# Altium PCB PCB2.PcbDoc
Units mm, origin at the board's own origin, x right, y up, seen from the top; angles counter-clockwise.
Board outline 160 x 90 mm, 2 copper layers (Top Layer, Bottom Layer); 56 components, 44 nets, 191 pads, 30 vias.
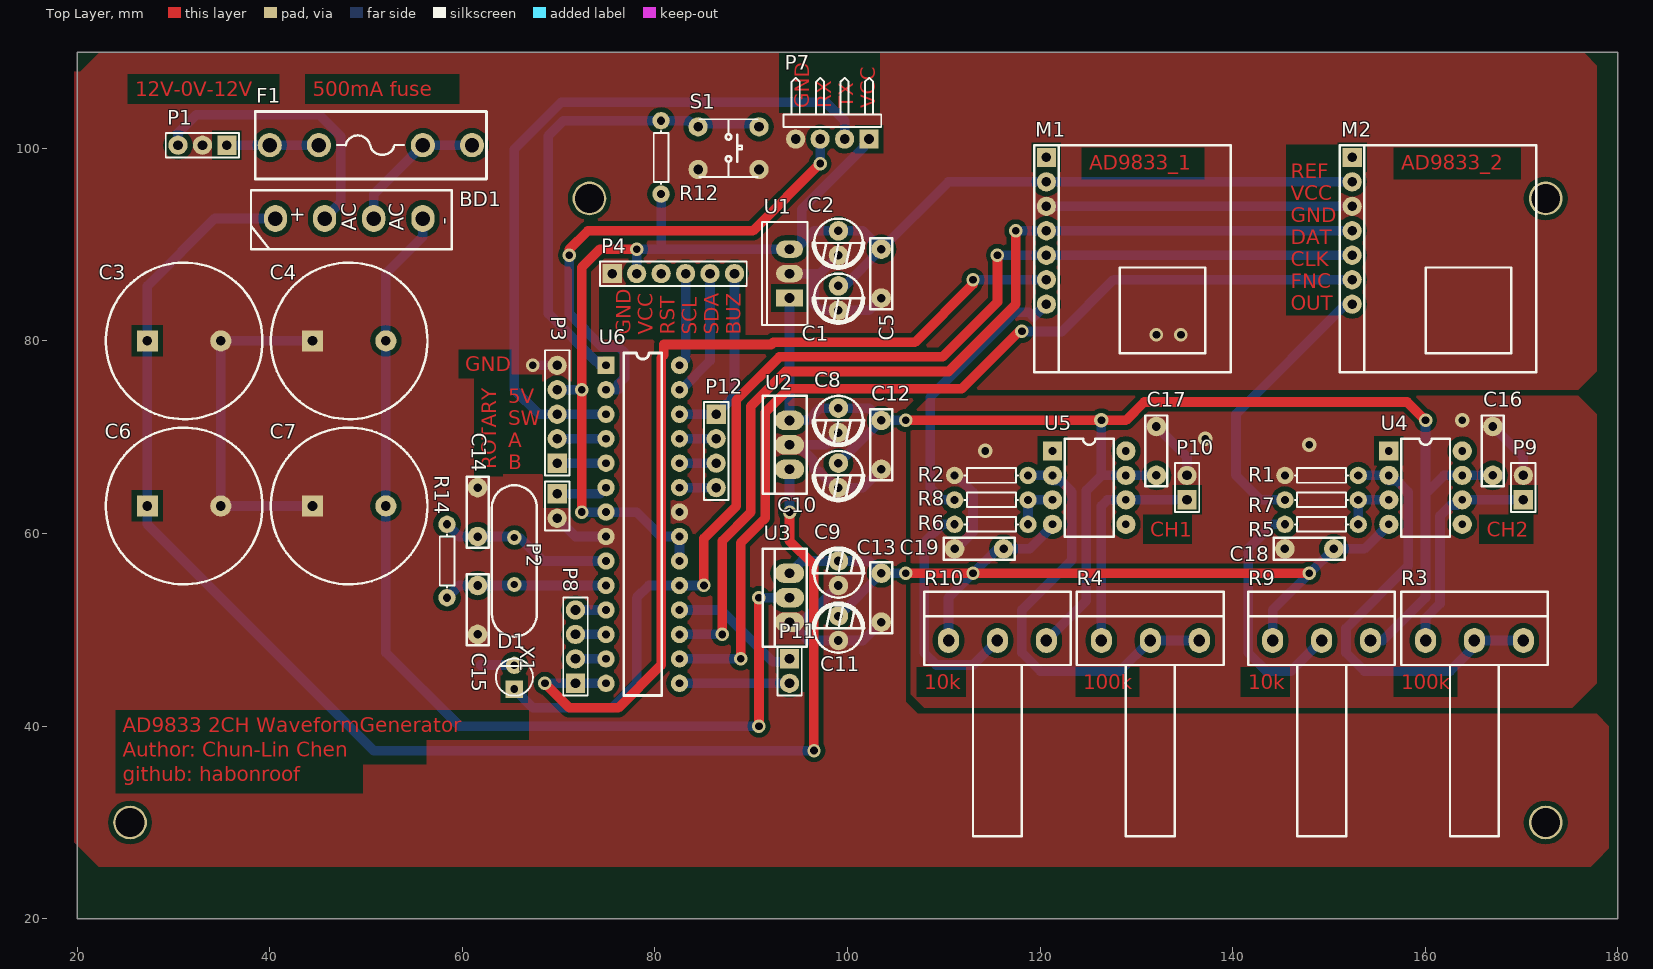
[diagram p0: Top Layer view]
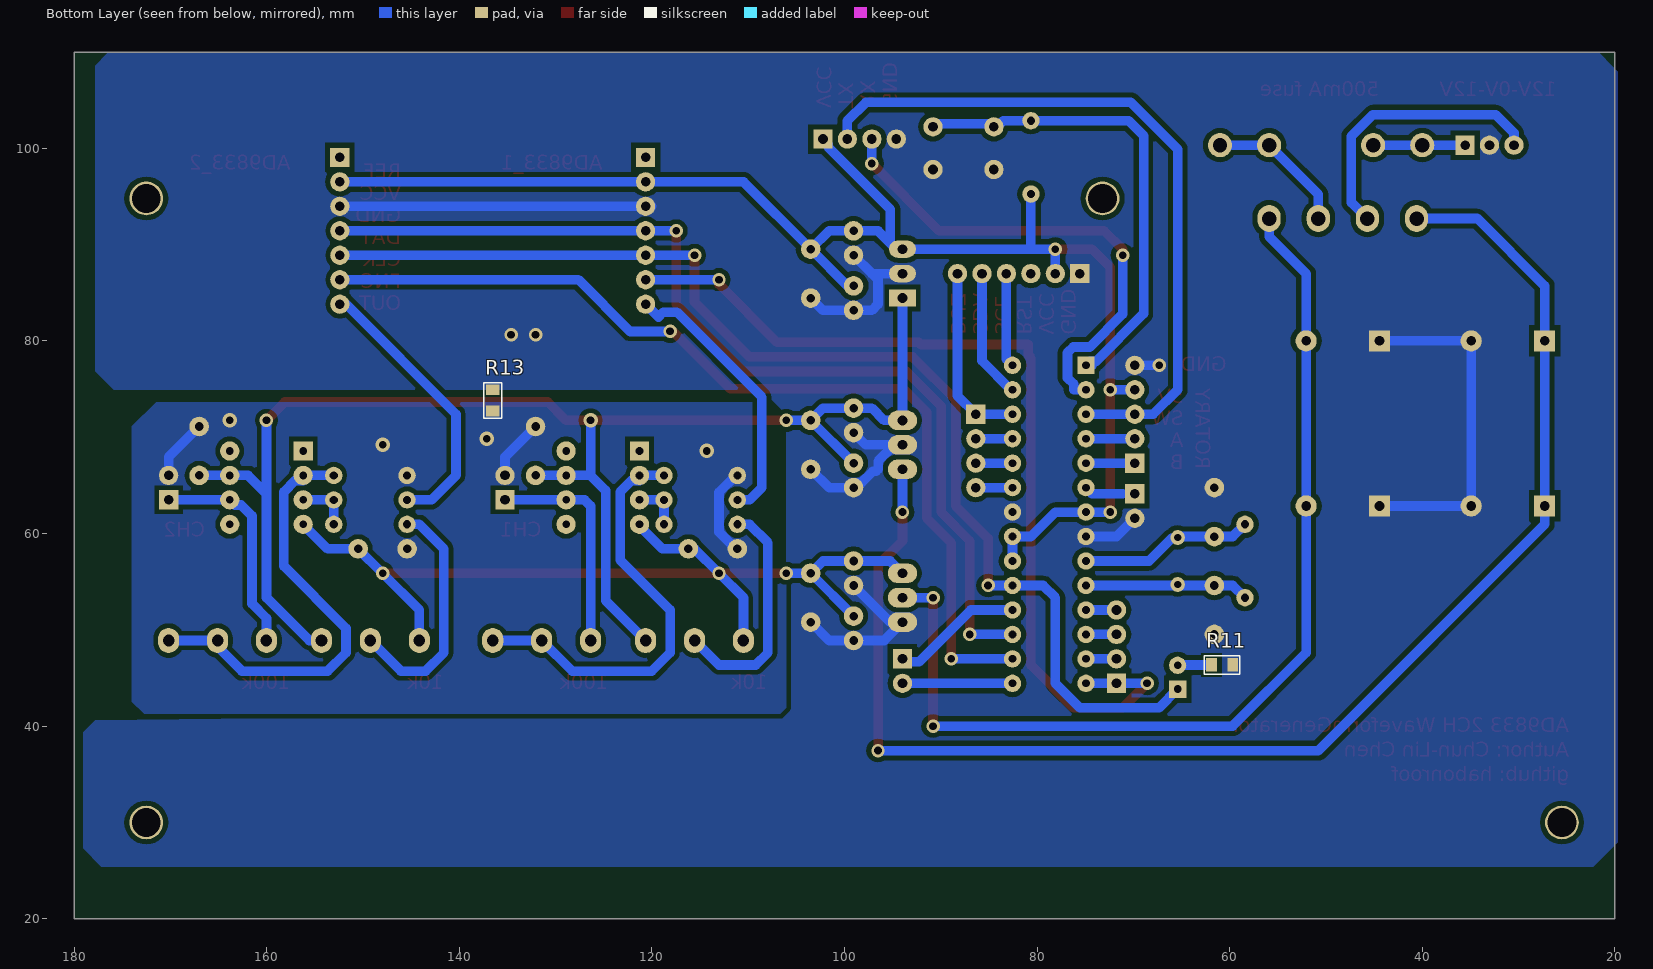
[diagram p1: Bottom Layer view, seen from below]

## Layer stack, top to bottom
Top Solder: solder mask 0.0102, Solder Resist, Dk 3.5
Top Layer: signal copper 0.0356
Dielectric 1: dielectric 0.32, FR-4, Dk 4.8
Bottom Layer: signal copper 0.0356
Bottom Solder: solder mask 0.0102, Solder Resist, Dk 3.5

## Board outline
20,20 20,110 180,110 180,20

## Design rules (kind name [scope] priority, off if disabled: settings)
Clearance [All] p1: gap=0.508
PlaneConnect [All] p1: planeconnectstyle=Direct reliefexpansion=0.508 reliefentries=4 reliefconductorwidth=0.254 reliefairgap=0.254
PolygonConnect [All] p1: connectstyle=Direct reliefconductorwidth=0.254 reliefentries=4 polygonreliefangle="90 Angle" airgapwidth=0.254
RoutingVias [All] p1: holewidth=0.711 width=1.27 viastyle="Through Hole" minholewidth=0.711 minwidth=1.27 maxholewidth=0.711 maxwidth=1.27
SolderMaskExpansion [All] p1: expansion=0.102
Width [All] p1: maxlimit=4 minlimit=0.254 preferedwidth=1
29 further rules are at their usual default settings.

## Components (designator, comment, footprint, x,y, rotation, side; value= is the part's Value field where it differs from the comment)
BD1 "Bridge" Bridge_KBL406 49.109,95.123 r90 top
C1 "JACKON LHK 100uF/10V" RAD-100_200 99.06,84.455 r270 top
C2 "JACKON LHK 100uF/10V" RAD-100_200 99.06,90.17 r270 top
C3 "1000uF/50V" Cap_M_1000uF/50V 31.115,80.01 r0 top
C4 "1000uF/50V" Cap_M_1000uF/50V 48.26,80.01 r0 top
C5 "100n/100V" CAP-200_100*300 103.505,86.995 r90 top
C6 "1000uF/50V" Cap_M_1000uF/50V 31.115,62.865 r0 top
C7 "1000uF/50V" Cap_M_1000uF/50V 48.26,62.865 r0 top
C8 "JACKON LHK 47uF/35V" RAD-100_200 99.06,71.755 r270 top
C9 "JACKON LHK 47uF/35V" RAD-100_200 99.06,55.88 r90 top
C10 "JACKON LHK 47uF/35V" RAD-100_200 99.06,66.04 r270 top
C11 "JACKON LHK 47uF/35V" RAD-100_200 99.06,50.165 r90 top
C12 "100n/100V" CAP-200_100*300 103.505,69.215 r90 top
C13 "100n/100V" CAP-200_100*300 103.505,53.34 r270 top
C14 "22p/1kV" CAP-200_100*300 61.595,62.23 r270 top
C15 "22p/1kV" CAP-200_100*300 61.595,52.07 r90 top
C16 "100n/100V" CAP-200_100*300 167.005,68.58 r90 top
C17 "100n/100V" CAP-200_100*300 132.08,68.58 r90 top
C18 "100n/100V" CAP-200_100*300 147.955,58.42 r0 top
C19 "100n/100V" CAP-200_100*300 113.665,58.42 r0 top
D1 "LED" LED_SMALL 65.405,45.085 r180 top
F1 "Fuse" FUSE 40.005,100.33 r0 top
M1 "AD9833 Module" AD9833 119.38,100.33 r270 top
M2 "AD9833 Module" AD9833 151.13,100.33 r270 top
P1 "12-0-12" HDR1X3 35.56,100.33 r180 top
P2 "OUTPUT EN" HDR1X2 69.85,64.135 r270 top
P3 "Header 5" HDR1X5 69.85,67.31 r90 top
P4 "12684LCD" HDR1X6 75.565,86.995 r0 top
P7 "UART Port" HDR1X4H 102.235,100.965 r180 top
P8 "Header 4" HDR1X4 71.755,44.45 r90 top
P9 "CH1_Out" HDR1X2 170.18,63.5 r90 top
P10 "CH2_out" HDR1X2 135.255,63.5 r90 top
P11 "Header 2" HDR1X2 93.98,46.99 r270 top
P12 "Header 4" HDR1X4 86.36,72.39 r270 top
R1 "2k" R-0.25W 149.225,66.04 r180 top
R2 "2k" R-0.25W 114.935,66.04 r180 top
R3 "100k" VR-Medium 165.1,48.895 r0 top
R4 "100k" VR-Medium 131.445,48.895 r0 top
R5 "2k" R-0.25W 149.225,60.96 r180 top
R6 "2k" R-0.25W 114.935,60.96 r180 top
R7 "2k" R-0.25W 149.225,63.5 r180 top
R8 "2k" R-0.25W 114.935,63.5 r180 top
R9 "10k" VR-Medium 149.225,48.895 r0 top
R10 "10k" VR-Medium 115.57,48.895 r0 top
R11 "220" RS0805 61.89,46.355 r0 bottom
R12 "10k" R-0.25W 80.645,99.06 r270 top
R13 "0" RS0805 136.525,72.73 r270 bottom
R14 "1M" R-0.25W 58.42,57.15 r270 top
S1 "SW PB" Button 87.645,100.02 r270 top
U1 "Regulator_7805" TO-220#1 93.98,86.995 r90 top
U2 "7812" TO-220#2 93.98,69.215 r90 top
U3 "7915" TO-220#2 93.98,53.34 r90 top
U4 "LM381" DIP-8 160.122,64.505 r0 top
U5 "LM381" DIP-8 125.197,64.505 r0 top
U6 "IC" DIP-28 74.93,77.47 r0 top
X1 "XTAL" HC49-4H 65.405,57.15 r270 top

## Footprints (in the part's own frame and the unit in brackets; to place one, negate y for a bottom-side part, rotate by r counter-clockwise, add the part's x,y. Pads: shape width x height; smd on the part's side, far side on the other; paste and mask are expansions set on the pad)
AD9833 [mm] "DDS signal generator"
  rect 2x2 hole 1: 1(1.27,1.27)
  round 2 hole 1: 2(3.81,1.27) 3(6.35,1.27) 4(8.89,1.27) 5(11.43,1.27) 6(13.97,1.27) 7(16.51,1.27)
  silkscreen extent 0,0 23.6,20.4
Bridge_KBL406 [mm]
  oval 2.8x2.4 hole 1.5: 1(-2.413,3.409) 2(-2.413,-1.691) 3(-2.413,8.509) 4(-2.413,-6.791)
  silkscreen extent -5.59,-9.78 0.51,11.05
Button [mm]
  round 2 hole 1: 1(-2.215,3.16) 1(-2.215,-3.16) 2(2.215,3.16) 2(2.215,-3.16)
  silkscreen extent -3,-3 3,3
CAP-200_100*300 [mil]
  round 80 hole 35: 1(-100,0) 2(100,0)
  silkscreen extent -145,-45 145,45, body extent -150,-50 150,50
Cap_M_1000uF/50V [mm] "Diameter : 16mm"
  rect 2.2x2.2 hole 1: 1(-3.81,0)
  round 2.2 hole 1: 2(3.81,0)
  silkscreen extent -8.13,-8.13 8.13,8.13
DIP-8 [mm] "DIP-8"
  rect 2x2 hole 0.8: 1(-3.912,4.075)
  round 2 hole 0.8: 2(-3.912,1.535) 3(-3.912,-1.005) 4(-3.912,-3.545) 5(3.708,-3.545) 6(3.708,-1.005) 7(3.708,1.535) 8(3.708,4.075)
  silkscreen extent -2.64,-4.81 2.44,5.35
DIP-28 [mm]
  rect 1.8x1.8 hole 0.8: 1(0,0)
  round 1.8 hole 0.8: 2(0,-2.54) 3(0,-5.08) 4(0,-7.62) 5(0,-10.16) 6(0,-12.7) 7(0,-15.24) 8(0,-17.78) 9(0,-20.32) 10(0,-22.86) 11(0,-25.4) 12(0,-27.94) 13(0,-30.48) 14(0,-33.02) 15(7.62,-33.02) 16(7.62,-30.48) 17(7.62,-27.94) 18(7.62,-25.4) 19(7.62,-22.86) 20(7.62,-20.32) 21(7.62,-17.78) 22(7.62,-15.24) 23(7.62,-12.7) 24(7.62,-10.16) 25(7.62,-7.62) 26(7.62,-5.08) 27(7.62,-2.54) 28(7.62,0)
  silkscreen extent 1.83,-34.29 5.79,1.27
FUSE [mm]
  round 2.5 hole 1.5: 1(0,0) 1(5.1,0) 2(15.9,0) 2(21,0)
  silkscreen extent -1.5,-3.5 22.5,3.5
HC49-4H [mil] "THT Oscillator package"
  round 60 hole 30: 1(-96.06,0) 2(96.06,0)
  silkscreen extent -309,-92 309,92
HDR1X2 [mm]
  rect 2x2 hole 1: 1(0,0)
  round 2 hole 1: 2(2.54,0)
  silkscreen extent -1.27,-1.27 3.81,1.27
HDR1X3 [mm]
  rect 2x2 hole 1: 1(0,0)
  round 2 hole 1: 2(2.54,0) 3(5.08,0)
  silkscreen extent -1.27,-1.27 6.35,1.27
HDR1X4 [mm]
  rect 2x2 hole 1: 1(0,0)
  round 2 hole 1: 2(2.54,0) 3(5.08,0) 4(7.62,0)
  silkscreen extent -1.27,-1.27 8.89,1.27
HDR1X4H [mm]
  rect 2x2 hole 1: 1(0,0)
  round 2 hole 1: 2(2.54,0) 3(5.08,0) 4(7.62,0)
  silkscreen extent -1.27,-6.35 8.89,-1.27
HDR1X5 [mm]
  rect 2x2 hole 1: 1(0,0)
  round 2 hole 1: 2(2.54,0) 3(5.08,0) 4(7.62,0) 5(10.16,0)
  silkscreen extent -1.27,-1.27 11.73,1.27
HDR1X6 [mm]
  rect 2x2 hole 1: 1(0,0)
  round 2 hole 1: 2(2.54,0) 3(5.08,0) 4(7.62,0) 5(10.16,0) 6(12.7,0)
  silkscreen extent -1.27,-1.27 13.97,1.27
LED_SMALL [mm]
  rect 1.8x1.8 hole 0.8: 1(0,1.235)
  round 1.8 hole 0.8: 2(0,-1.235)
  silkscreen extent -1.92,-1.92 1.92,1.92
R-0.25W [mm]
  round 1.8 hole 0.85: 1(-3.81,0) 2(3.81,0)
  silkscreen extent -2.77,-0.76 2.77,0.76
RAD-100_200 [mil]
  round 80 hole 35: 1(-50,0) 2(50,0)
  silkscreen extent -100,-100 100,100, body extent -100,-100 100,100
RS0805 [mm]
  rect 1.1x1.4 smd mask+0.02: 1(0,0) 2(-2.2,0)
  silkscreen extent -2.95,-0.95 0.75,0.95
TO-220#1 [mm]
  rect 1.8x2.8 hole 1: 1(-2.54,0)
  oval 1.8x2.8 hole 1: 2(0,0) 3(2.54,0)
  silkscreen extent -5.35,-1.85 5.35,2.85
TO-220#2 [mm]
  oval 2.032x3.048 hole 1.016: 1(-2.54,0) 2(0,0) 3(2.54,0)
  silkscreen extent -5.08,-1.78 5.08,2.79, body extent -5.21,-1.91 5.21,2.92
VR-Medium [mm] "炭膜可變電阻"
  oval 2.2x2.6 hole 1.2: 1(-5.08,0) 2(0,0) 3(5.08,0)
  silkscreen extent -7.62,-20.32 7.62,5.08

## Part data
BD1: "全波整流器"
C1 C2 C8 C9 C10 C11: "JACKON LHK General Purpose"
C3 C4 C6 C7: library part Cap_EC_Medium, "有極性電解電容(中)"
C5 C12 C13 C16 C17 C18 C19: "Metallized Polyester Film Capacitor"
C14 C15: "Ceramic Capacitor"
P1: library part "Header 3", "Header, 3-Pin"
P2 P9 P10: library part "Header 2", "Header, 2-Pin"
P3: "Header, 5-Pin"
P4: library part "Header 6", "Header, 6-Pin"
P7: library part "Header 4", "Header, 4-Pin"
P8 P12: "Header, 4-Pin"
P11: "Header, 2-Pin"
R1 R2 R5 R6 R7 R8 R11 R12 R13 R14: library part Resistor, "固定電阻"
R3 R4 R9 R10: library part Resistor_Potentiometer, "可變電阻"
S1: "Button Switch"
U1: library part Regulator-7805, "Voltage Regulator"
U2: library part 7805, "THREE TERMINAL POSITIVE VOLTAGE REGULATORS"
U3: "THREE TERMINAL NEGATIVE VOLTAGE REGULATORS"
U4 U5: library part LM318, "Single OPA SR:50v/uS"
U6: library part Atmega328P, "Arduino controller"
X1: "Crystal Oscillator"

## Free pads (board coordinates)
  round 3.5 hole 3: 3(25.5,30) 3(73.2,94.8) 3(172.5,30) 3(172.5,94.8)

## Via types
v1: diameter 1.4, hole 0.8, Top Layer to Bottom Layer, 25 vias
v2: diameter 1.5, hole 0.8, Top Layer to Bottom Layer, 5 vias

## Nets (pads, with @x,y where several pads share a name; then routed paths per layer and width w, separated by ;. In a path a pad name is that pad's centre, name@x,y a point inside that pad or via, vN(x,y) a via of type N, cw(c..) or ccw(c..) an arc to the next point about the centre after c; other vN are vias at no path point)
+12V: C8.1 C10.1 C12.2 C16.1 C17.1 R9.3 R10.3 U1.1 U2.3 U4.7 U5.7 | length 151.1
  Top Layer w1: v1(106.045,71.755) v2(126.365,71.755) 128.905,71.755 130.81,73.66 158.115,73.66 v1(160.02,71.755)
  Bottom Layer w1: U1.1 U2.3 95.885,71.755 97.155,73.025 C8.1 102.235,73.025 C12.2 ; C10.1 C12.2 ; v1(106.045,71.755) C12.2 ; R10.3@121.285,49.53 124.801,53.046 124.801,64.476 126.365,66.04 ; v2(126.365,71.755) 126.365,66.04 ; C17.1 U5.7 126.365,66.04 ; R9.3 155.575,48.895 160.02,53.34 v1(160.02,71.755) ; 160.258,64.373 161.925,66.04 U4.7 C16.1
-12V: C9.2 C11.2 C13.1 C18.2 C19.2 R9.1 R10.1 U3.3 U4.4 U5.4 | length 98.2
  Top Layer w1: v1(106.045,55.88) v1(113.03,55.88) v1(147.955,55.88)
  Bottom Layer w1: U3.3 95.25,57.15 C9.2 102.235,57.15 C13.1 ; C11.2 C13.1 ; v1(106.045,55.88) C13.1 ; R10.1 110.49,53.34 v1(113.03,55.88) C19.2@115.57,58.42 ; C19.2 118.903,58.42 121.285,60.802 U5.4 U5.4@121.16,60.96 ; R9.1 144.145,52.07 v1(147.955,55.88) C18.2 153.67,58.42 U4.4
A: P3.2 U6.4 | length 5.1
  Bottom Layer w1: P3.2 U6.4
AGND: C16.2 C17.2 C18.1 C19.1 P9.2 P10.2 R1.2 R2.2 R13.1 | length 22.2
  Bottom Layer w1: C19.1 111.283,58.42 113.033,60.17 113.033,61.75 113.03,61.753 113.03,62.707 113.033,62.71 113.033,64.29 111.283,66.04 R2.2 ; C17.2 135.255,67.945 P10.2 ; C16.2 170.18,67.945 P9.2
  other v2: 114.3,68.58 147.955,69.215 137.16,69.85 163.83,71.755
B: P3.1 U6.5 | length 5.1
  Bottom Layer w1: P3.1 U6.5
BUSY: P4.6 P12.1 U6.26 | length 19.2
  Bottom Layer w1: U6.26 P12.1 88.265,74.295 P4.6
CH1_OUT: P9.1 R3.1 U4.6 | length 22.9
  Bottom Layer w1: R3.1 160.02,51.207 161.528,52.715 161.528,61.833 162.663,62.968 163.298,62.968 U4.6 P9.1
CH2_OUT: P10.1 R4.1 U5.6 | length 23.1
  Bottom Layer w1: R4.1 126.365,62.865 127,63.5 U5.6 P10.1
D13: D1.1 M1.5 M2.5 U6.19 | length 124.6
  Top Layer w1: v1(85.09,54.61) 85.09,59.484 88.432,62.826 88.432,73.843 92.932,78.343 109.865,78.343 115.57,84.048 v1(115.57,88.9)
  Bottom Layer w1: D1.1 67.345,41.91 75.565,41.91 78.105,44.45 78.105,53.34 79.375,54.61 U6.19 v1(85.09,54.61) ; v1(115.57,88.9) M1.5 M2.5
FNC: M2.6 U6.16 | length 98.6
  Top Layer w1: v1(88.9,46.99) 88.9,59.029 91.448,61.577 91.448,72.593 93.904,75.049 111.879,75.049 117.827,80.997 v1(118.11,80.997)
  Bottom Layer w1: U6.16 v1(88.9,46.99) ; v1@118.693,80.98 122.255,80.98 127.635,86.36 M2.6@151.868,86.36
FNC2: M1.6 P8.1 U6.14 | length 97.5
  Top Layer w1: v1(68.58,44.45) 71.12,41.91 76.2,41.91 80.642,46.352 80.642,78.26 80.907,78.525 80.907,79.637 92.094,79.637 92.308,79.851 106.988,79.851 113.03,85.893 v1(113.03,86.36)
  Bottom Layer w1: v1(68.58,44.45) P8.1 U6.14 ; v1(113.03,86.36) M1.6
GND: C1.2 C2.2 C3.2 C4.1 C5.1 C6.2 C7.1 C8.2 C9.1 C10.2 C11.1 C12.1 C13.2 C14.1 C15.1 M1.3 M2.3 P1.2 P2.2 P3.5 P4.1 P7.4 R11.2 R13.2 S1.2 U1.2 U2.2 U3.1 U6.8 U6.22 | length 128.4
  Bottom Layer w1: C7.1 C6.2 C3.2 C4.1 ; v1(67.31,77.47) P3.5 ; P2.2@70.485,60.96 71.755,59.69 U6.8 ; U2.2 U2.2@94.81,69.215 ; U1.2 97.155,86.995 ; C9.1 95.25,50.8 U3.1 95.885,48.895 C11.1 101.6,48.895 C13.2 ; C8.2 97.79,69.215 U2.2@94.81,69.215 ; C2.2 97.155,86.995 ; C12.1 101.6,64.77 C10.2 98.544,65.286 98.222,65.286 97.036,66.472 96.723,66.472 96.512,66.683 96.512,67.513 U2.2@94.81,69.215 ; C5.1 102.235,83.185 C1.2 97.155,83.185 96.52,83.82 96.52,86.36 97.155,86.995 ; M1.3@120.015,93.98 M1.3 M2.3
  other v1: 132.08,80.645 134.62,80.645
NetBD1_1: BD1.1 P1.3 | length 29.1
  Bottom Layer w1: P1.3 30.48,101.6 32.385,103.505 45.123,103.505 47.363,101.265 47.363,94.373 BD1.1
NetBD1_2: BD1.2 F1.2 | length 14.8
  Bottom Layer w1: BD1.2 50.8,95.225 55.905,100.33 F1.2@61.005,100.33
NetBD1_3: BD1.3 C3.1 C6.1 U2.1 | length 150.2
  Top Layer w1: v1(93.98,62.23) 93.98,59.25 96.512,56.718 96.512,37.473 v1(96.52,37.465)
  Bottom Layer w1: BD1.3 34.29,92.71 27.305,85.725 C3.1 C6.1 27.305,60.96 50.8,37.465 v1(96.52,37.465) ; v1(93.98,62.23) U2.1
NetBD1_4: BD1.4 C4.2 C7.2 U3.2 | length 105.1
  Top Layer w1: v1(90.805,40.005) v1(90.805,53.34)
  Bottom Layer w1: BD1.4 55.9,90.825 52.07,86.995 C4.2 C7.2 52.07,47.625 59.69,40.005 v1(90.805,40.005) ; v1(90.805,53.34) U3.2
NetC14_2: C14.2 R14.1 U6.9 X1.1 | length 17.4
  Bottom Layer w1: R14.1 59.69,59.69 C14.2 65.305,59.69 X1.1 ; X1.1@66.04,59.49 68.38,57.15 U6.9
NetC15_2: C15.2 R14.2 U6.10 X1.2 | length 17.1
  Bottom Layer w1: R14.2 59.69,54.61 C15.2 65.305,54.61 X1.2 65.505,54.61 U6.10
NetD1_2: D1.2 R11.1 | length 3.5
  Bottom Layer w1: R11.1 65.37,46.355 D1.2
NetF1_1: F1.1 P1.1 | length 9.5
  Bottom Layer w1: P1.1 40.005,100.33 F1.1@45.105,100.33
NetP8_2: P8.2 U6.13 | length 3.2
  Bottom Layer w1: P8.2 U6.13
NetP8_3: P8.3 U6.12 | length 3.2
  Bottom Layer w1: P8.3 U6.12
NetP8_4: P8.4 U6.11 | length 3.2
  Bottom Layer w1: P8.4 U6.11
NetP11_1: P11.1 U6.18 | length 13.8
  Bottom Layer w1: U6.18 86.87,52.07 92.268,46.672 93.662,46.672 P11.1
NetP11_2: P11.2 U6.15 | length 11.4
  Bottom Layer w1: U6.15 P11.2
NetP12_2: P12.2 U6.25 | length 3.8
  Bottom Layer w1: U6.25 P12.2
NetP12_3: P12.3 U6.24 | length 3.8
  Bottom Layer w1: U6.24 P12.3
NetP12_4: P12.4 U6.23 | length 3.8
  Bottom Layer w1: U6.23 P12.4
NetR1_1: R1.1 R3.2 R3.3 U4.2 | length 46.5
  Bottom Layer w1: R1.1 U4.2 156.21,65.508 157.042,65.508 158.218,64.332 158.218,56.618 151.765,50.165 151.765,47.625 153.67,45.72 162.56,45.72 165.1,48.26 R3.2 R3.3
NetR2_1: R2.1 R4.2 R4.3 U5.2 | length 44.9
  Bottom Layer w1: R2.1 U5.2 121.285,65.508 122.117,65.508 123.293,64.332 123.293,57.259 118.11,52.076 118.11,47.625 120.015,45.72 128.27,45.72 R4.2 R4.3
NetR5_1: R5.1 R7.1 U4.3 | length 5.7
  Bottom Layer w1: R5.1 R7.1 U4.3
NetR5_2: R5.2 R9.2 | length 25.4
  Bottom Layer w1: R5.2 144.145,60.96 141.605,58.42 141.605,47.625 143.51,45.72 146.05,45.72 R9.2
NetR6_1: R6.1 R8.1 U5.3 | length 5.1
  Bottom Layer w1: R6.1 R8.1 U5.3
NetR6_2: R6.2 R10.2 | length 24.6
  Bottom Layer w1: R6.2 109.855,60.96 107.95,59.055 107.95,47.625 109.22,46.355 113.03,46.355 R10.2
NetR12_1: R12.1 S1.1 U6.1 | length 49.3
  Bottom Layer w1: U6.1@74.295,77.47 U6.1 74.53,77.87 73.895,77.87 68.934,82.831 68.934,101.319 70.485,102.87 R12.1 83.51,102.87 83.835,102.545 S1.1@90.155,102.545
"O/P EN": P2.1 U6.6 | length 4.1
  Bottom Layer w1: 71.12,64.135 71.12,64.138 74.298,64.138 U6.6
OUT1: M2.7 R7.2 | length 28.6
  Bottom Layer w1: R7.2 142.875,63.5 140.335,66.04 140.335,72.39 M2.7@151.765,83.82
OUT2: M1.7 R8.2 | length 28.9
  Bottom Layer w1: R8.2 109.855,63.5 108.585,64.77 108.585,74.17 117.403,82.988 118.817,82.988 119.318,82.488 M1.7
RX: P7.3 U6.2 | length 51.8
  Top Layer w1: v1(71.12,88.9) 71.12,89.535 73.025,91.44 90.17,91.44 v1(97.155,98.425)
  Bottom Layer w1: v1(71.12,88.9) 71.12,82.778 74.52,79.378 76.248,79.378 76.838,78.788 76.838,76.152 76.248,75.562 76.2,75.562 76.2,74.93 U6.2 ; v1(97.155,98.425) P7.3
SCL: P4.4 U6.28 | length 9.8
  Bottom Layer w1: U6.28 83.185,78.105 P4.4
SDA: P4.5 U6.27 | length 13.5
  Bottom Layer w1: U6.27 82.708,74.93 85.725,77.947 P4.5
SDAT: M1.4 M2.4 U6.17 | length 103.8
  Top Layer w1: v1(86.995,49.53) 86.995,59.256 89.94,62.201 89.94,73.218 93.557,76.835 110.49,76.835 117.475,83.82 v1(117.475,91.44)
  Bottom Layer w1: U6.17 v1(86.995,49.53) ; v1(117.475,91.44) M1.4 M2.4
SW: P3.3 P7.2 U6.3 | length 74.6
  Bottom Layer w1: U6.3 P3.3 67.945,72.39 65.405,74.93 65.405,99.923 70.26,104.778 81.435,104.778 81.438,104.775 97.787,104.775 ; 97.787,104.778 99.695,102.87 P7.2
VCC: C1.1 C2.1 C5.2 M1.2 M2.2 P3.4 P4.2 P7.1 R12.2 U1.3 U6.7 U6.20 U6.21 | length 155.4
  Top Layer w1: v1(72.39,62.23) v1(72.39,74.93) 72.39,87.63 74.295,89.535 v1(78.105,89.535)
  Bottom Layer w1: P3.4 v1(72.39,74.93) ; v1(72.39,62.23) U6.7 78.105,62.23 80.645,59.69 U6.21 U6.20 ; P4.2 v1(78.105,89.535) 80.645,89.535 ; R12.2 80.645,89.535 ; C1.1 99.695,85.725 C5.2 ; P7.1 101.703,100.433 101.703,100.133 95.25,93.68 95.25,90.805 ; M2.2 M1.2 110.49,96.52 C5.2 ; 80.645,89.535 U1.3 94.615,89.535 95.25,90.17 ; 95.25,90.17 95.25,90.805 ; 95.25,90.17 95.567,90.487 ; 95.25,90.805 95.567,90.487 ; 95.567,90.487 96.52,91.44 C2.1 101.6,91.44 C5.2
pads on no net: M1.1 M2.1 P4.3 U4.1 U4.5 U4.8 U5.1 U5.5 U5.8

## Polygon pours and split planes (outlines as drawn)
GND on Bottom Layer "GND_L02_P004" (solid, remove dead copper, pour order 4): 137.16,74.93 175.895,74.93 177.8,76.835 177.8,108.585 176.53,109.855 21.59,109.855 20.32,108.585 19.685,107.95 19.685,31.75 19.685,27.94 22.225,25.4 176.53,25.4 177.165,25.4 179.07,27.305 179.07,39.37 177.8,40.64 106.68,41.275 106.68,41.91 106.045,42.545 106.045,71.755 106.045,72.39 108.585,74.93
AGND on Bottom Layer "AGND_L02_P002" (solid, remove dead copper, pour order 2): 106.045,70.485 106.045,53.34 106.045,41.91 106.68,41.275 172.72,41.275 173.99,42.545 173.99,71.12 171.45,73.66 107.95,73.66 106.045,71.755
GND on Top Layer "GND_L01_P006" (solid, remove dead copper, pour order 6): 22.225,109.855 20.32,107.95 19.685,107.95 19.685,27.94 22.225,25.4 177.165,25.4 177.8,26.035 179.07,27.305 179.07,28.575 179.07,39.37 179.07,40.005 177.8,41.275 107.315,41.275 106.045,42.545 106.045,43.18 106.045,73.025 107.95,74.93 175.895,74.93 177.8,76.835 177.8,108.585 176.53,109.855
AGND on Top Layer "Top Layer-No Net" (solid, pour order 12): 106.045,71.755 108.585,74.295 175.895,74.295 177.8,72.39 177.8,44.45 175.26,41.91 107.95,41.91 106.045,43.815

## Other copper
Top Layer:
  text "12V-0V-12V" at 26.035,105.41 h1.52
  text "500mA fuse" at 44.45,105.41 h1.52
  text "GND / RX / TX / VCC" at 102.87,104.14 h1.52 r90
  text "AD9833_1" at 125.095,97.79 h1.52
  text "AD9833_2" at 157.48,97.79 h1.52
  text "REF / VCC / GND / DAT / CLK / FNC / OUT" at 146.05,83.185 h1.52
  text "GND / VCC / RST / SCL / SDA / BUZ" at 88.9,80.645 h1.52 r90
  text "GND" at 60.325,76.835 h1.52
  text "ROTARY" at 63.5,66.675 h1.52 r90
  text "5V / SW / A / B" at 64.77,66.675 h1.52
  text "CH1" at 131.445,59.69 h1.52
  text "CH2" at 166.37,59.69 h1.52
  text "10k" at 107.95,43.815 h1.52
  text "100k" at 124.46,43.815 h1.52
  text "10k" at 141.605,43.815 h1.52
  text "100k" at 157.48,43.815 h1.52
  text "AD9833 2CH WaveformGenerator" at 24.765,39.37 h1.52
  text "Author: Chun-Lin Chen" at 24.765,36.83 h1.52
  text "github: habonroof" at 24.765,34.29 h1.52

## Silkscreen, mask and mechanical layers (free items; w line width, h text height)
Mechanical 1:
  the board outline again, w0.254

## Text inside footprints (layer, text, board x,y; h text height)
BD1: Top Overlay "-" at 58.761,92.075 h1.52 r90; Top Overlay "AC" at 53.935,91.44 h1.52 r90; Top Overlay "AC" at 48.982,91.44 h1.52 r90; Top Overlay "+" at 43.521,92.202 h1.52 r90